# EAGLE board integratedBertha (EAGLE 6.6.0)
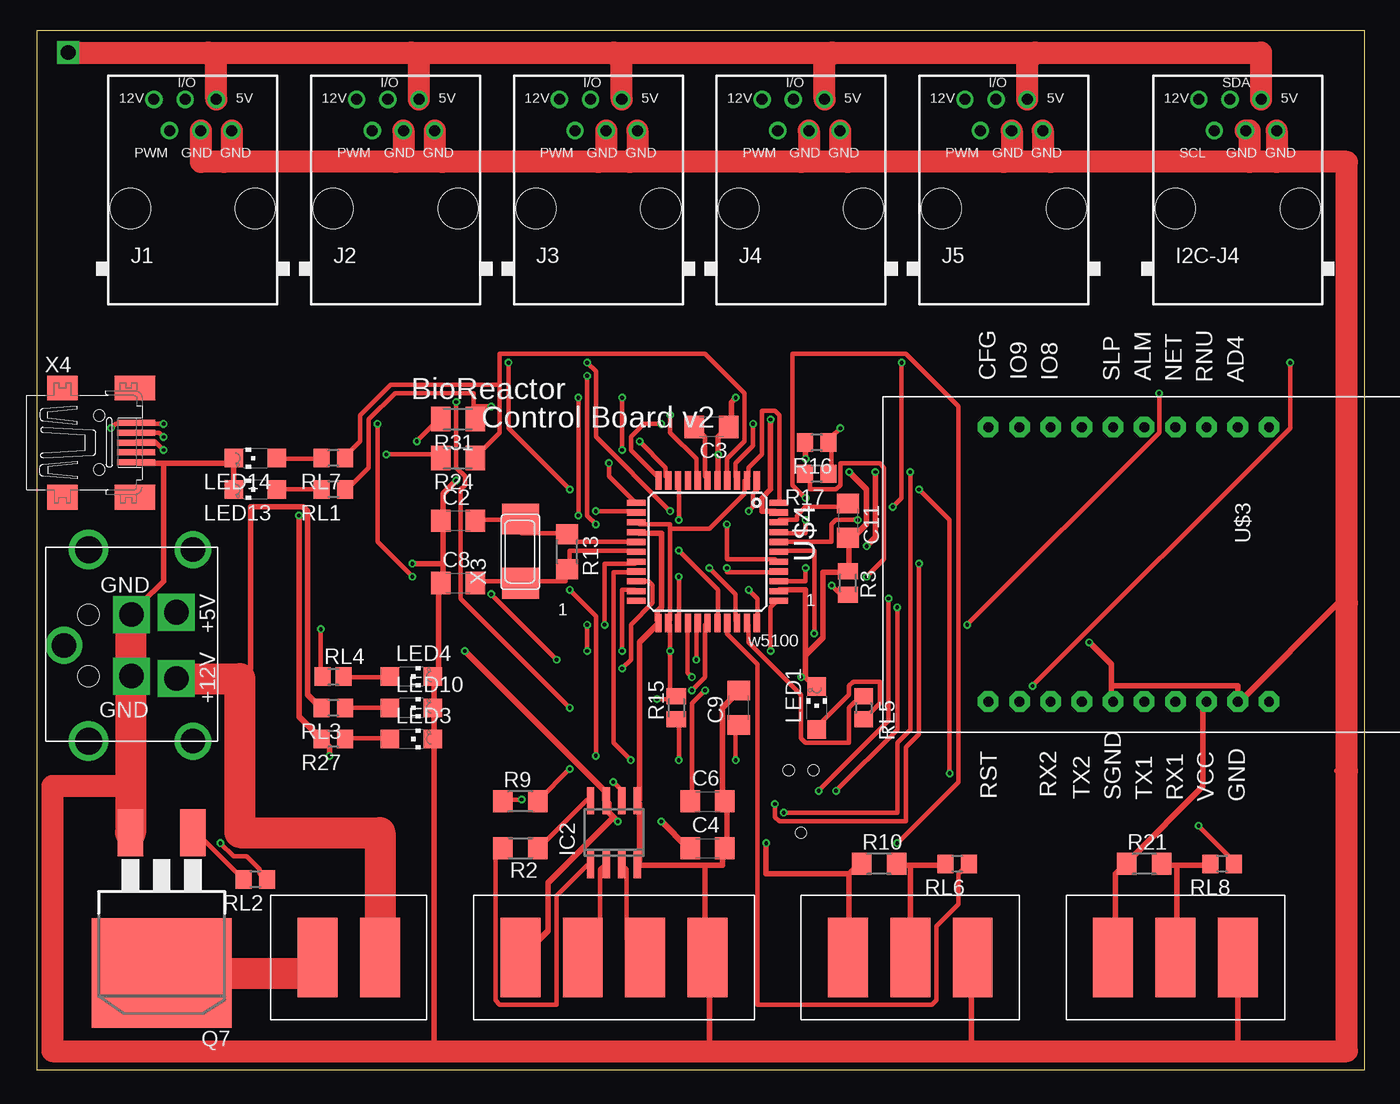
[diagram p0: board, top side]
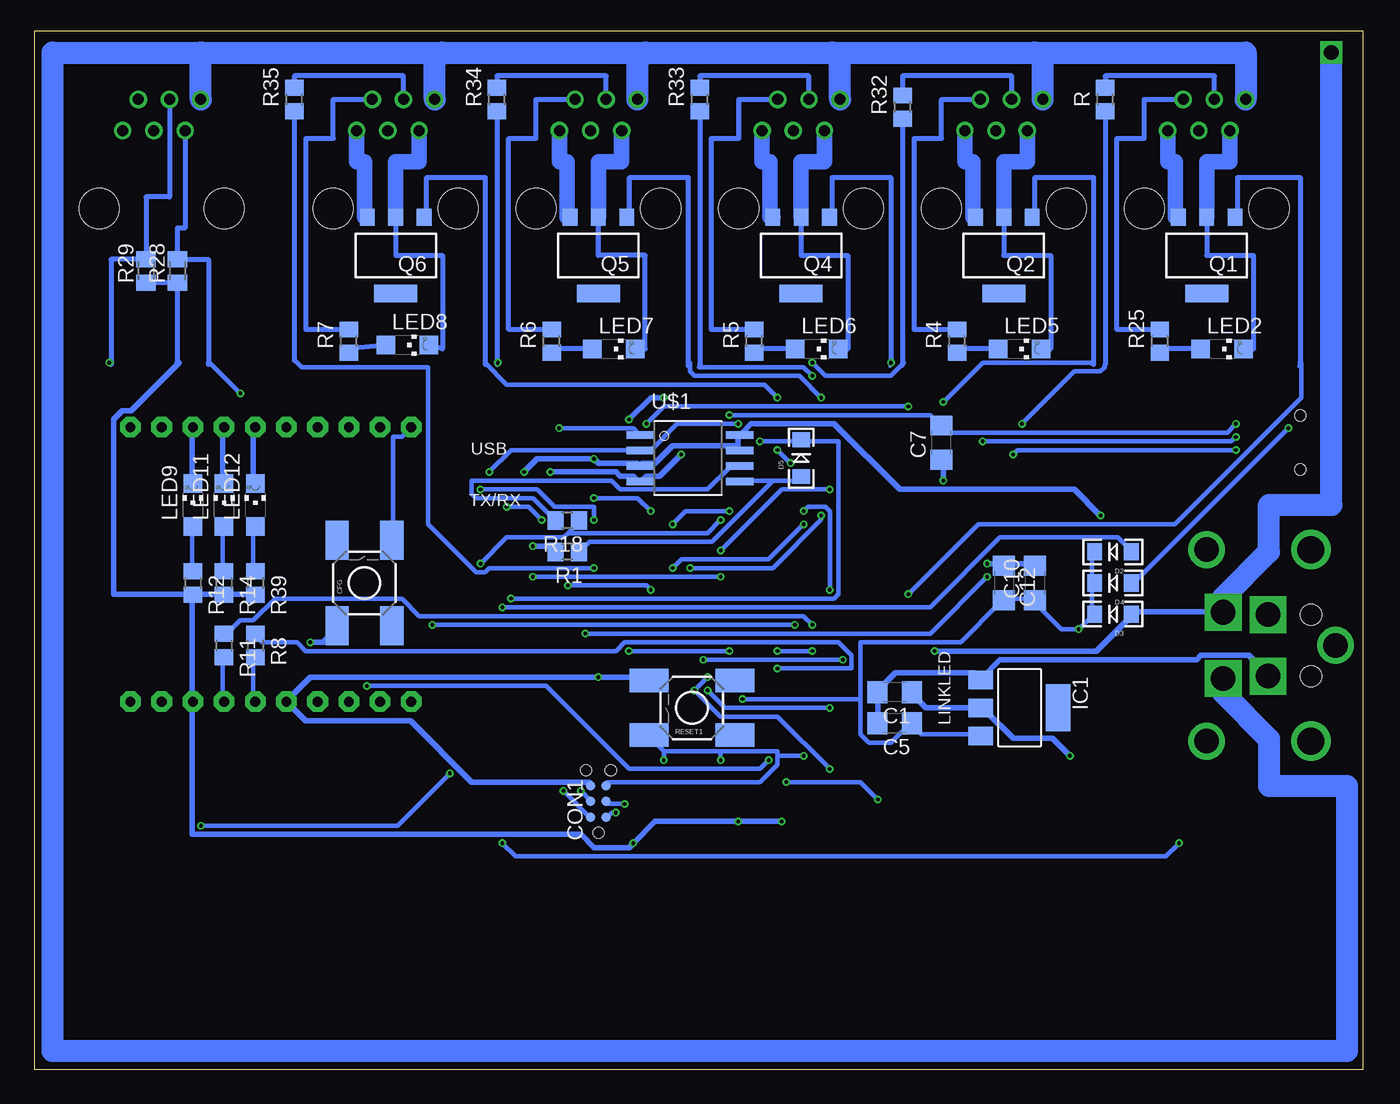
[diagram p1: board, bottom side, seen from below]

Size 108.13 x 84.57 mm. Coordinates in mm from the lower left corner, seen from the top.
Outline: 0,0 108.13,0 108.13,84.57 0,84.57 0,0
Copper layers (1*16): Top 0.035mm / dielectric 1.5mm / Bottom 0.035mm
Design rules "Fusion_eagle_rule_v1.1": minimum track width 6mil, minimum drill 12mil, track to track 6mil, track to pad 6mil, pad to pad 6mil, via to via 6mil, smd to smd 0mil, copper to edge 10mil, drill to drill 10mil, minimum pad ring 10mil, minimum via ring 6mil, stop-mask expansion 2mil, vias tented up to drill 100mil, thermal gap 10mil
Net classes: 0 default: width 0.356 mm; 1 power: width 0.457 mm; 2 VIN: width 0.457 mm; 3 fine: width 0.356 mm; 4 aref: width 0.356 mm
bKeepout: area -1.3,57.4 to 114.3,85.3; area -7.6,54.9 to 108,82.8
tRestrict: area -5.1,58.7 to 118.1,85.3
bRestrict: area -5.1,58.7 to 118.1,85.3
vRestrict: area 47,34.5 to 62.2,38.4; area 47,35.8 to 50.8,49.8; area 58.4,37.1 to 62.2,49.8; area 47,46 to 62.2,49.8; area 47,25.7 to 62.2,29.5; area 0,0.3 to 108,18

## Footprints (pad centres in the part's own frame; a part is rotated, then mirrored left to right if it is on the bottom)
C1206 = smd 1.6 x 1.8: 1 -1.4,0; 2 1.4,0
TACTILE_SWITCH_SMD = smd 3.175 x 1.905: 1 -3.493,2.223; 2 3.493,2.223; 3 -3.493,-2.223; 4 3.493,-2.223
TC2030-MCP-NL = smd 0.787 x 0.787: 5V 1.27,0.635; GND 3.81,0.635; MISO 1.27,-0.635; MOSI 2.54,0.635; RESET 3.81,-0.635; SCK 2.54,-0.635 | hole 0.889: 0,0; 5.08,-1.016; 5.08,1.016
LED-1206 = smd 1.2 x 1.4: A -1.5,0; C 1.5,0
RJ12-STRAIGHT-I2C = drill 0.9 pad 1.4: +5V 1.905,8.89; +12V -3.175,8.89; GND1 3.175,6.35; GND2 0.635,6.35; SCL -1.905,6.35; SDA -0.635,8.89 | hole 3.251: -5.08,0; 5.08,0
SOT223 = smd 1.499 x 2.007: 1 -2.261,-3.15; 2 0.025,-3.15; 3 2.311,-3.15 | smd 3.81 x 2.007: 4 0,3.15
SO8 = smd 0.6 x 2.2: 1 -1.905,-2.6; 2 -0.635,-2.6; 3 0.635,-2.6; 4 1.905,-2.6; 5 1.905,2.6; 6 0.635,2.6; 7 -0.635,2.6; 8 -1.905,2.6
RJ12-STRAIGHT = drill 0.9 pad 1.4: +5V 1.905,8.89; +12V -3.175,8.89; GND1 3.175,6.35; GND2 0.635,6.35; I/O -0.635,8.89; PWM -1.905,6.35 | hole 3.251: -5.08,0; 5.08,0
2-PIN-5.08S = smd 3.251 x 6.452: 1 -2.54,0; 2 2.54,0
CHIPLED_1206 = smd 1.5 x 1.5: A 0,-1.75; C 0,1.75
PG-SOT-223 = smd 1.2 x 1.4: 1 -2.311,-3.099; 2 0,-3.099; 3 2.311,-3.099 | smd 3.5 x 1.4: 4 0,3.099
D2PACK = smd 2.083 x 3.81: 1 -2.54,-8.89; 3 2.54,-8.89 | smd 11.43 x 8.89: 2 0,2.54
R0805 = smd 1.3 x 1.5: 1 -0.95,0; 2 0.95,0
R1206 = smd 1.6 x 1.803: 1 -1.422,0; 2 1.422,0
M0805 = smd 1.3 x 1.6: 1 -0.95,0; 2 0.95,0
M1206 = smd 1.6 x 2: 1 -1.4,0; 2 1.4,0
R0805' = smd 1.3 x 1.5: 1 -0.85,0; 2 0.85,0
SOIC_8-LEAD = smd 0.61 x 2.21: CE -1.905,-2.934; RST/HOLD -0.635,5.156; SCK 0.635,5.156; SI 1.905,5.156; SO -0.635,-2.934; VDD -1.905,5.156; VSS 1.905,-2.934; WP 0.635,-2.934
SZ05-ZIGBEE = drill 0.8 pad 1.676 octagon: 6 -11.415,13.971; 7 -11.415,11.431; 11 -11.415,1.271; 12 -11.415,-1.269; 13 -11.415,-3.809; 14 -11.415,-6.349; 17 10.925,-6.349; 18 10.925,-3.809; 19 10.925,-1.269; 25 10.925,13.971; ALM -11.415,3.811; CFG -11.415,-8.889; GND 10.925,11.431; NET -11.415,6.351; RNU -11.415,8.891; RST 10.925,-8.889; RX1 10.925,6.351; SGND 10.925,1.271; TX1 10.925,3.811; VCC 10.925,8.891
TQFP44 = smd 1.5 x 0.5: 1 -5.8,4; 2 -5.8,3.2; 3 -5.8,2.4; 4 -5.8,1.6; 5 -5.8,0.8; 6 -5.8,0; 7 -5.8,-0.8; 8 -5.8,-1.6; 9 -5.8,-2.4; 10 -5.8,-3.2; 11 -5.8,-4; 23 5.8,-4; 24 5.8,-3.2; 25 5.8,-2.4; 26 5.8,-1.6; 27 5.8,-0.8; 28 5.8,0; 29 5.8,0.8; 30 5.8,1.6; 31 5.8,2.4; 32 5.8,3.2; 33 5.8,4 | smd 0.5 x 1.5: 12 -4,-5.8; 13 -3.2,-5.8; 14 -2.4,-5.8; 15 -1.6,-5.8; 16 -0.8,-5.8; 17 0,-5.8; 18 0.8,-5.8; 19 1.6,-5.8; 20 2.4,-5.8; 21 3.2,-5.8; 22 4,-5.8; 34 4,5.8; 35 3.2,5.8; 36 2.4,5.8; 37 1.6,5.8; 38 0.8,5.8; 39 0,5.8; 40 -0.8,5.8; 41 -1.6,5.8; 42 -2.4,5.8; 43 -3.2,5.8; 44 -4,5.8
KPJX-4S-S = drill 2 square: +5V 2.7,1.35; +12V -2.7,1.35; GND1 -2.5,5; GND2 2.5,5 | drill 2: P$1 -7.8,0; P$2 7.8,0; P$11 0,10.5 | drill 2.2: P$3 -7.8,8.5; P$4 7.8,8.5 | hole 1.7: -2.5,8.5; 2.5,8.5
4-PIN-5.08S = smd 3.251 x 6.452: 1 -7.62,0; 2 -2.54,0; 3 2.54,0; 4 7.62,0
3-PIN-5.08S = smd 3.251 x 6.452: 1 -5.08,0; 2 0,0; 3 5.08,0
NX6035 = smd 2.5 x 3: P$1 2.665,0; P$2 -2.565,0
32005-201 = smd 3.1 x 0.5: 1 3,1.6; 2 3,0.8; 3 3,0; 4 3,-0.8; 5 3,-1.6 | smd 2.5 x 2: M1 -3,-4.45; M2 -3,4.45 | smd 3.3 x 2: M3 2.9,4.45; M4 2.9,-4.45 | hole 0.9: 0,2.2; 0,-2.2

## Placement (x,y rotation side)
C1  10uF  [C1206]  38.1,30.73 180 bottom
C2  22pF  [C1206]  34.29,44.7 0 top
C3  100nF  [C1206]  54.93,52.32 180 top
C4  100nF  [C1206]  54.61,18.03 0 top
C5  10uF  [C1206]  38.1,28.19 180 bottom
C6  330nF  [C1206]  54.61,21.84 0 top
C7  10uF  [C1206]  34.29,51.05 90 bottom
C8  22pF  [C1206]  34.29,39.62 0 top
C9  100nF  [C1206]  57.15,29.46 90 top
C10  10uF  [C1206]  26.67,39.62 90 bottom
C11  100nF  [C1206]  66.04,44.7 270 top
C12  100nF  [C1206]  29.21,39.62 270 bottom
CFG  Configure  [TACTILE_SWITCH_SMD]  81.28,39.62 90 bottom
CON1  SPI  [TC2030-MCP-NL]  62.23,19.3 90 bottom
D2  1N581D1206  [LED-1206]  20.32,42.16 180 bottom
D3  1N581D1206  [LED-1206]  20.32,37.08 180 bottom
D4  1N581D1206  [LED-1206]  20.32,39.62 180 bottom
D5  1N581D1206  [LED-1206]  45.72,49.78 90 bottom
I2C-J4  RJ12STRAIGHT-I2C  [RJ12-STRAIGHT-I2C]  97.79,70.1 0 top
IC1  REG1117  [SOT223]  27.94,29.46 270 bottom
IC2  AD8223  [SO8]  46.99,19.3 0 top
J1  RJ12  [RJ12-STRAIGHT]  12.7,70.1 0 top
J2  RJ12  [RJ12-STRAIGHT]  29.21,70.1 0 top
J3  RJ12  [RJ12-STRAIGHT]  45.72,70.1 0 top
J4  RJ12  [RJ12-STRAIGHT]  62.23,70.1 0 top
J5  RJ12  [RJ12-STRAIGHT]  78.74,70.1 0 top
J7  22--02  [2-PIN-5.08S]  25.4,9.14 180 top
LED1  GREEN  [CHIPLED_1206]  63.5,29.46 0 top
LED2  Blue  [CHIPLED_1206]  11.43,58.67 270 bottom
LED3  RED  [CHIPLED_1206]  30.48,26.92 270 top
LED4  RED  [CHIPLED_1206]  30.48,32 270 top
LED5  Blue  [CHIPLED_1206]  27.94,58.67 270 bottom
LED6  Blue  [CHIPLED_1206]  44.45,58.67 270 bottom
LED7  BLue  [CHIPLED_1206]  60.96,58.67 270 bottom
LED8  Blue  [CHIPLED_1206]  77.79,58.99 270 bottom
LED9  RED  [CHIPLED_1206]  95.25,45.97 0 bottom
LED10  RED  [CHIPLED_1206]  30.48,29.46 270 top
LED11  RED  [CHIPLED_1206]  92.71,45.97 0 bottom
LED12  RED  [CHIPLED_1206]  90.17,45.97 0 bottom
LED13  RED  [CHIPLED_1206]  17.78,47.24 90 top
LED14  GREEN  [CHIPLED_1206]  17.78,49.78 90 top
Q1  BSP75  [PG-SOT-223]  12.7,66.29 180 bottom
Q2  BSP75  [PG-SOT-223]  29.21,66.29 180 bottom
Q4  BSP75  [PG-SOT-223]  45.72,66.29 180 bottom
Q5  BSP75  [PG-SOT-223]  62.23,66.29 180 bottom
Q6  BSP75  [PG-SOT-223]  78.74,66.29 180 bottom
Q7  IRF3704S  [D2PACK]  10.16,10.41 180 top
R  1k  [R0805]  20.95,78.99 90 bottom
R1  10k  [R0805]  64.77,42.16 180 bottom
R2  300  [R1206]  39.37,18.03 180 top
R3  10k  [M0805]  66.04,39.62 270 top
R4  1k  [R0805]  33.02,59.31 90 bottom
R5  1k  [R0805]  49.53,59.31 90 bottom
R6  1k  [R0805]  66.04,59.31 90 bottom
R7  1k  [R0805]  82.55,59.31 90 bottom
R8  1K  [R0805]  90.17,34.54 270 bottom
R9  100  [R1206]  39.37,21.84 0 top
R10  4.7k  [R1206]  68.58,16.76 0 top
R11  1K  [R0805]  92.71,34.54 270 bottom
R12  1K  [R0805]  95.25,39.62 270 bottom
R13  1M  [R1206]  43.18,42.16 270 top
R14  1K  [R0805]  92.71,39.62 270 bottom
R15  10k  [M0805]  52.07,29.46 90 top
R16  10k  [R0805]  63.5,51.05 180 top
R17  1k  [R0805]  63.5,48.51 180 top
R18  10k  [R0805]  64.77,44.7 180 bottom
R21  4.7k  [R1206]  90.17,16.76 0 top
R24  22  [M1206]  34.29,49.78 180 top
R25  1k  [R0805]  16.51,59.31 90 bottom
R27  1K  [R0805]  24.13,26.92 180 top
R28  10K  [M0805]  96.52,65.02 90 bottom
R29  10K  [M0805]  99.06,65.02 90 bottom
R31  22  [M1206]  34.29,52.96 180 top
R32  1k  [R0805]  37.47,78.36 90 bottom
R33  1k  [R0805]  53.98,78.99 90 bottom
R34  1k  [R0805]  70.48,78.99 90 bottom
R35  1k  [R0805]  87,78.99 90 bottom
R39  1K  [R0805]  90.17,39.62 270 bottom
RESET1  Reset uC  [TACTILE_SWITCH_SMD]  54.61,29.46 180 bottom
RL1  1K  [R0805]  24.13,47.24 180 top
RL2  1K  [R0805]  17.78,15.49 180 top
RL3  1K  [R0805]  24.13,29.46 180 top
RL4  1K  [R0805']  24.13,32 0 top
RL5  1K  [R0805]  67.31,29.46 270 top
RL6  1K  [R0805]  74.93,16.76 180 top
RL7  1K  [R0805]  24.13,49.78 180 top
RL8  1K  [R0805]  96.52,16.76 180 top
U$1  SST25VF064C  [SOIC_8-LEAD]  55.88,49.78 270 bottom
U$3  SZ05-ZIGBEE  [SZ05-ZIGBEE]  86.36,40.89 270 top
U$4  ATMEGA32U4-AU  [TQFP44]  54.61,42.16 270 top
U$6  KPJX-4S-S  [KPJX-4S-S]  12.7,34.54 90 top
X1  22-23-20415.08S  [4-PIN-5.08S]  46.99,9.14 0 top
X2  22-23-20315.08S  [3-PIN-5.08S]  71.12,9.14 0 top
X3  16MHz  [NX6035]  39.37,42.16 90 top
X4  MINI-USB  [32005-201]  5.08,51.05 0 top
X5  22-23-20315.08S  [3-PIN-5.08S]  92.71,9.14 0 top

## Library data of the parts
C1-C12 R R1 R4-R8 R11-R14 R16-R18 R25 R27 R32-R35 R39 RL1-RL3 RL5-RL8 = rcl
CFG CON1 D2-D5 I2C-J4 J1-J5 J7 RESET1 U$3 U$6 X1-X3 X5 = lpatiny
IC1 = burr-brown; MPN: REG1117; OC_FARNELL: 1097566; OC_NEWARK: 14P6981
IC2 = analog-devices; MPN: AD620AR; OC_FARNELL: 1464424; OC_NEWARK: 05F7109
LED1-LED14 U$4 = adafruit
Q1 Q2 Q4-Q6 = infineon; OC_FARNELL: unknown; OC_NEWARK: unknown
Q7 = transistor-power
R2 R3 R9 R10 R15 R21 R24 R28 R29 R31 RL4 = resistor
U$1 = BertaLib
X4 = con-cypressindustries; OC_FARNELL: unknown; OC_NEWARK: unknown

## Nets
3.3V [power]: C1.1 IC1.2 R1.2 R16.2 R27.2 U$1.RST/HOLD U$1.VDD U$1.WP
+5V [power]: C4.1 D3.A I2C-J4.+5V IC2.7 J1.+5V J2.+5V J3.+5V J4.+5V J5.+5V R4.2 R5.2 R6.2 R7.2 R10.1 R12.2 R14.2 R21.1 R25.2 R28.1 R29.1 R39.2 U$3.VCC U$6.+5V X1.1 X2.1 X5.1
+5V/1 [fine]: C5.1 C10.1 C12.2 D2.C D3.C D4.C IC1.3 R15.2 RL4.1 U$4.2 U$4.14 U$4.24 U$4.34 U$4.44
+12V [power]: I2C-J4.+12V J1.+12V J2.+12V J3.+12V J4.+12V J5.+12V J7.1 RL3.2 U$6.+12V
A0: R35.1 U$4.36
A1: R33.1 U$4.37
A2: R32.1 U$4.38
A3: R.1 U$4.39
A4: R34.1 U$4.40
A5: RL8.1 U$4.41
AREF: C11.1 U$4.42
CS: R17.2 U$4.25
D5*: Q5.1 U$4.31
D6*: Q1.1 U$4.27
D7*: RL2.1 U$4.1
D8*: Q2.1 U$4.28
D9*: Q4.1 U$4.29
D10*: RL6.1 U$4.30
D11*: Q6.1 U$4.12
D12*: C6.1 R9.2 U$4.26
D13*: RL5.1 U$4.32
D+USB: R24.2 X4.3
D-USB: R31.2 X4.2
DIFF+: IC2.3 X1.3
DIFF-: IC2.2 X1.2
FMOSI: D5.A R1.1 U$1.SI
GND [power]: C1.2 C2.1 C3.1 C4.2 C5.2 C6.2 C7.1 C8.1 C9.2 C10.2 C11.2 C12.1 CFG.1 CON1.GND I2C-J4.GND1 I2C-J4.GND2 IC1.1 IC2.4 IC2.5 J1.GND1 J1.GND2 J2.GND1 J2.GND2 J3.GND1 J3.GND2 J4.GND1 J4.GND2 J5.GND1 J5.GND2 LED1.C LED3.C LED4.C LED10.C LED13.C LED14.C Q1.3 Q2.3 Q4.3 Q5.3 Q6.3 Q7.3 R3.1 RESET1.4 U$1.VSS U$3.GND U$3.SGND U$4.5 U$4.15 U$4.23 U$4.35 U$4.43 U$6.GND1 U$6.GND2 X1.4 X2.3 X4.5 X5.3
GND1 [VIN]: LED9.C U$3.RNU
GND2 [VIN]: LED11.C U$3.NET
GND3 [VIN]: LED12.C U$3.ALM
HWB: R3.2 U$4.33
ISP+5V: CON1.5V D2.A
MISO: CON1.MISO U$1.SO U$4.11
MOSI: CON1.MOSI D5.C U$4.10
N$1: J3.PWM LED6.C Q4.2
N$2: J2.I/O R32.2
N$3: LED1.A RL5.2
N$4: LED5.A R4.1
N$5: J4.PWM LED7.C Q5.2
N$6: Q7.1 RL2.2
N$7: J3.I/O R33.2
N$8: LED13.A RL1.2
N$9 [power]: R21.2 RL8.2 X5.2
N$10: R16.1 R17.1 U$1.CE
N$11: R11.2 U$3.RX1
N$12: LED4.A RL4.2
N$13: IC2.1 R2.2
N$14: LED14.A RL7.2
N$15: IC2.8 R2.1
N$16: C3.2 U$4.6
N$17: LED2.A R25.1
N$18: J1.I/O R.2
N$19: J5.PWM LED8.C Q6.2
N$20: LED3.A R27.1
N$21 [power]: R10.2 RL6.2 X2.2
N$22: LED6.A R5.1
N$23: R18.2 U$1.SCK
N$24: R8.2 U$3.TX1
N$25: LED9.A R12.1
N$26: LED11.A R14.1
N$27: LED12.A R39.1
N$28: J2.PWM LED5.C Q2.2
N$29: J4.I/O R34.2
N$30: LED7.A R6.1
N$32: J5.I/O R35.2
N$33: LED8.A R7.1
N$34: J1.PWM LED2.C Q1.2
N$35: CFG.4 U$3.CFG
N$36: J7.2 Q7.2
N$40: IC2.6 R9.1
N$42: C8.2 R13.2 U$4.17 X3.P$2
N$75: LED10.A RL3.1
RD+: R24.1 RL7.1 U$4.4
RD-: R31.1 RL1.1 U$4.3
RESET: C9.1 CON1.RESET R15.1 RESET1.2 U$4.13
RX: R8.1 U$4.20
RXLED: U$4.8
SCK: CON1.SCK R18.1 U$4.9
SCL: I2C-J4.SCL R28.2 U$4.18
SDA: I2C-J4.SDA R29.2 U$4.19
TX: R11.1 U$4.21
TXLED: U$4.22
VUSB: C7.2 D4.A U$4.7 X4.1
XTAL1: C2.2 R13.1 U$4.16 X3.P$1

## Tracks (layer width: path | path; a pad name or v marks a point on that pad's centre or on a via)
3.3V  (via drill 0.3)
  Top 0.457: v23.82,25.55 23.82,26.26 23.47,26.62 R27.2 23.11,26.98 21.34,28.75 v21.34,45.11 | v62.59,49.73 62.59,50.8 R16.2 | v67.56,42.62 68.28,43.33 v68.28,48.67
  Bottom 0.457: v23.82,25.55 25.25,26.98 28.45,26.98 30.58,29.11 30.94,29.11 IC1.2 31.29,29.46 35.56,29.46 36.63,30.53 C1.1 | 50.85,50.8 50.85,51.51 U$1.VDD 50.49,51.87 49.78,52.58 43.03,52.58 37.69,47.24 23.47,47.24 v21.34,45.11 | 50.85,50.8 50.85,50.44 U$1.RST/HOLD | v67.56,42.62 66.14,42.62 65.79,42.27 R1.2 | v68.28,48.67 67.21,49.73 v62.59,49.73 62.23,49.38 59.03,49.38 U$1.WP 58.67,49.38 57.61,49.38 56.19,50.8 50.85,50.8
+5V  (via drill 0.3, 1.2)
  Top 0.457: X5.1 87.83,9.2 87.83,15.95 88.54,16.66 R21.1 88.9,17.02 94.94,23.06 94.94,29.82 U$3.VCC | 66.14,15.95 66.85,16.66 R10.1 | 66.14,15.95 66.14,9.2 X2.1 | v50.85,20.22 52.98,18.09 C4.1 | 46.94,20.57 46.58,20.93 46.58,21.64 IC2.7 46.23,22 46.23,22.71 v34.85,34.09 | 46.94,20.57 v47.3,20.22 | 46.94,20.57 41.6,15.24 41.6,11.33 39.47,9.2 X1.1 | 66.14,15.95 59.38,15.95 v59.38,18.44
  Top 1.778: v2.54,82.8 13.97,82.8 | 13.97,82.8 30.48,82.8 | 30.48,82.8 46.99,82.8 | 46.99,82.8 64.77,82.8 | 64.77,82.8 81.28,82.8 | 81.28,82.8 99.69,82.8 I2C-J4.+5V | J1.+5V 14.61,82.17 13.97,82.8 | J2.+5V 31.11,82.17 30.48,82.8 | J3.+5V 47.62,82.17 46.99,82.8 | J4.+5V 64.14,82.17 64.77,82.8 | J5.+5V 80.64,82.17 81.28,82.8
  Bottom 0.406: R25.2 20,60.26 20,75.82 17.78,75.82 17.78,78.99 J1.+5V | R4.2 36.51,60.26 36.51,75.82 34.29,75.82 34.29,78.99 J2.+5V | R5.2 53.02,60.26 53.02,75.82 50.8,75.82 50.8,78.99 J3.+5V | R6.2 69.53,60.26 69.53,75.82 67.31,75.82 67.31,78.99 J4.+5V | R7.2 86.04,60.26 86.04,75.82 83.82,75.82 83.82,78.99 J5.+5V | R29.1 R28.1 96.52,57.56 96.52,57.4
  Bottom 0.457: R39.2 90.32,38.71 92.46,38.71 R14.2 92.81,38.71 94.94,38.71 R12.2 | R12.2 95.3,38.35 95.3,30.18 U$3.VCC 95.3,29.82 95.3,19.15 63.65,19.15 62.59,18.09 59.74,18.09 v59.38,18.44 57.61,20.22 v50.85,20.22 v47.3,20.22 | 96.52,57.56 96.37,57.56 100.28,53.64 100.99,53.64 101.7,52.93 101.7,38.71 95.3,38.71 R12.2 | U$6.+5V 12.09,37.29 18.49,37.29 D3.A 18.85,36.93 21.69,34.09 v34.85,34.09
  Bottom 1.778: U$6.+5V 11.35,38.43 7.62,42.16 7.62,45.97 2.54,45.97 v2.54,82.8
+5V/1  (via drill 0.3)
  Top 0.356: v23.11,35.86 23.11,32.31 RL4.1 | 51.56,44.04 51.56,36.58 U$4.24 51.56,36.22 v51.56,34.09 51.56,30.89 51.92,30.53 R15.2 51.92,30.18 v50.49,30.18 | 51.56,44.04 51.56,44.4 49.07,44.4 U$4.14 | v59.74,34.09 59.74,37.64 60.1,38 U$4.34 | 51.56,44.04 54.76,44.04 57.61,46.89 57.61,47.95 U$4.2 57.96,48.31 57.96,49.02 59.03,50.09 59.03,53.64 60.1,53.64 60.45,53.29 60.45,46.18 U$4.44
  Bottom 0.356: IC1.3 31.29,27.33 35.92,27.33 36.63,28.04 C5.1 36.98,28.04 38.41,26.62 40.18,26.62 40.89,27.33 40.89,30.18 | D2.C 22.05,41.91 22.05,39.78 D4.C 22.05,39.42 22.05,37.29 D3.C 22.05,36.93 v23.11,35.86 24.54,35.86 26.67,38 C10.1 26.67,38.35 29.16,38.35 C12.2 29.52,38 32.72,34.8 40.89,34.8 40.89,30.18 | v51.56,34.09 v59.74,34.09 | v50.49,30.18 40.89,30.18
+12V
  Top 0.457: RL3.2 23.11,29.46 22.05,30.53 22.05,45.47 21.69,45.82 17.42,45.82 17.42,32.66 16.51,31.84
  Top 2.54: U$6.+12V 16.51,31.84 16.51,19.3 27.94,19.3 J7.1
  Bottom 1.778: 94.61,82.8 106.68,82.8 106.68,1.52 1.27,1.52 1.27,23.11 7.62,23.11 7.62,26.92 11.35,30.65 U$6.+12V | 94.61,82.8 74.93,82.8 | 74.93,82.8 58.42,82.8 | 58.42,82.8 43.18,82.8 | 43.18,82.8 26.67,82.8 | 26.67,82.8 9.53,82.8 J1.+12V | J3.+12V 42.55,82.17 43.18,82.8 | J4.+12V 59.05,82.17 58.42,82.8 | J5.+12V 75.56,82.17 74.93,82.8 | J2.+12V 26.04,82.17 26.67,82.8 | I2C-J4.+12V 94.61,82.8
A0  (via drill 0.3)
  Top 0.356: v62.59,40.84 62.59,39.78 60.45,39.78 U$4.36
  Bottom 0.305: 86.87,57.66 87,57.72
  Bottom 0.356: v62.59,40.84 71.12,40.84 71.48,40.49 72.19,40.49 76.1,44.4 76.1,57.2 86.41,57.2 86.87,57.66
  Bottom 0.406: R35.1 87,57.72
A1  (via drill 0.3)
  Top 0.356: v56.19,40.84 56.19,40.49 60.1,40.49 U$4.37 | v45.52,44.4 44.81,45.11 v44.81,56.49
  Bottom 0.305: 53.95,57.25 53.98,57.4
  Bottom 0.356: v56.19,40.84 55.47,41.55 48.36,41.55 v45.52,44.4 | v44.81,56.49 45.52,57.2 54.05,57.2 53.95,57.25
  Bottom 0.406: R33.1 53.98,57.4
A2  (via drill 0.3)
  Top 0.356: v56.19,44.4 56.19,41.55 60.1,41.55 U$4.38 | v51.56,45.47 45.52,51.51 45.52,56.84 v44.81,57.56
  Bottom 0.305: 37.49,57.25 37.47,57.4
  Bottom 0.356: v56.19,44.4 55.12,45.47 v51.56,45.47 | v44.81,57.56 43.74,56.49 38.41,56.49 37.34,57.56 37.47,57.56
  Bottom 0.406: R32.1 37.47,57.56 37.47,57.4
A3  (via drill 0.3)
  Top 0.356: v63.3,35.51 63.3,42.27 60.45,42.27 U$4.39 | v30.58,40.13 27.74,42.98 v27.74,52.58
  Bottom 0.305: 21.03,57.25 20.95,57.4
  Bottom 0.356: v63.3,35.51 35.2,35.51 v30.58,40.13 | v27.74,52.58 23.47,56.84 21.34,56.84 20.98,57.2 21.03,57.25
  Bottom 0.406: R.1 20.95,57.4
A4  (via drill 0.3)
  Top 0.356: v66.85,44.75 65.08,44.75 64.72,44.4 64.72,42.98 60.45,42.98 U$4.40 | v69.7,45.82 70.41,46.53 v70.41,57.56
  Bottom 0.305: 70.41,57.45 70.48,57.45
  Bottom 0.356: v66.85,44.75 67.92,45.82 v69.7,45.82 | v70.41,57.56 70.41,57.45
  Bottom 0.406: R34.1 70.48,57.45 70.48,57.4
A5  (via drill 0.3)
  Top 0.356: v62.59,44.75 62.59,43.69 60.45,43.69 U$4.41 | v71.83,47.24 74.32,44.75 v74.32,24.13 | v94.59,19.86 97.43,17.02 RL8.1
  Bottom 0.356: v62.59,44.75 62.59,45.82 65.79,45.82 67.21,47.24 v71.83,47.24 | v74.32,24.13 78.59,19.86 v94.59,19.86
AREF
  Top 0.356: U$4.42 60.45,44.75 61.87,44.75 61.87,45.11 62.59,45.82 65.79,45.82 C11.1
CS  (via drill 0.3)
  Top 0.356: v52.27,40.13 52.27,36.58 U$4.25 | v67.56,40.13 68.99,41.55 68.99,49.02 68.63,49.38 65.43,49.38 65.43,47.6 65.08,47.24 62.94,47.24 62.94,47.95 62.59,48.31 R17.2
  Bottom 0.356: v67.56,40.13 v52.27,40.13
D5*  (via drill 0.3)
  Top 0.356: v54.76,40.84 56.9,38.71 56.9,36.58 U$4.31 | v44.09,54.71 v44.09,45.11
  Bottom 0.305: 54.97,57.25 54.93,57.4
  Bottom 0.356: v54.76,40.84 48.01,40.84 44.09,44.75 v44.09,45.11 | v44.09,54.71 45.87,56.49 54.41,56.49 54.76,56.84 54.76,57.56 54.93,57.56
  Bottom 0.406: Q5.1 59.69,69.39 59.69,72.64 54.93,72.64 54.93,57.56 54.93,57.4
D6*  (via drill 0.3)
  Top 0.356: v53.7,33.38 53.7,36.22 U$4.27 | v36.98,38.71 v42.32,33.38
  Bottom 0.305: 5.18,57.25 5.08,57.4
  Bottom 0.356: v42.32,33.38 v53.7,33.38 | v36.98,38.71 31.29,44.4 15.29,44.4 4.98,54.71 4.98,57.56 5.08,57.56
  Bottom 0.406: Q1.1 10.16,69.39 10.16,72.64 5.08,72.64 5.08,57.56 5.08,57.4
D7*  (via drill 0.3)
  Top 0.356: v14.94,18.44 16,17.37 17.07,17.37 18.14,16.31 18.14,15.95 18.49,15.6 RL2.1 | v70.05,18.44 75.03,23.42 75.03,54 70.76,58.27 61.52,58.27 61.52,47.6 v62.59,46.53 | v57.96,45.47 58.32,45.82 58.32,46.89 58.67,47.24 58.67,47.95 U$4.1
  Bottom 0.356: v14.94,18.44 16,17.37 68.99,17.37 v70.05,18.44 | v62.59,46.53 59.03,46.53 v57.96,45.47
D8*  (via drill 0.3)
  Top 0.356: v53.34,30.89 54.41,31.95 54.41,36.22 U$4.28 | v43.38,29.46 34.49,38.35 34.49,47.24 34.85,47.6 34.85,48.31 34.14,49.02 v34.14,54.36
  Bottom 0.305: 22.05,57.45 21.91,57.45
  Bottom 0.356: v53.34,30.89 51.92,29.46 v43.38,29.46 | v34.14,54.36 30.94,57.56 22.05,57.56 22.05,57.45
  Bottom 0.406: Q2.1 26.67,69.39 26.67,72.64 21.91,72.64 21.91,57.45 21.91,57.4
D9*  (via drill 0.3)
  Top 0.356: v52.27,42.27 55.47,39.06 55.47,36.58 U$4.29 | v43.38,47.24 38.41,52.22 v38.41,57.56
  Bottom 0.305: 38.51,57.25 38.42,57.4
  Bottom 0.356: v52.27,42.27 47.3,47.24 v43.38,47.24 | v38.41,57.56 38.42,57.4
  Bottom 0.406: Q4.1 43.18,69.39 43.18,72.64 38.42,72.64 38.42,57.4
D10*
  Top 0.356: RL6.1 75.74,16.66 75.03,15.95 75.03,13.46 73.25,11.68 73.25,5.64 72.9,5.28 58.67,5.28 58.67,33.02 56.19,35.51 56.19,36.22 U$4.30
D11*  (via drill 0.3)
  Top 0.356: v46.58,49.38 46.58,48.31 48.72,46.18 U$4.12 | v47.65,54.71 v47.65,50.44
  Bottom 0.305: 71.42,58.06 71.44,58.06
  Bottom 0.356: v47.65,50.44 v46.58,49.38 | v47.65,54.71 48.72,55.78 69.7,55.78 71.48,57.56 71.44,57.56
  Bottom 0.406: Q6.1 76.2,69.39 76.2,72.64 71.44,72.64 71.44,58.06 71.44,57.56 71.44,57.4
D12*  (via drill 0.3)
  Top 0.356: v53.34,31.95 52.98,32.31 52.98,36.22 U$4.26 | v54.41,30.89 53.34,29.82 53.34,22 C6.1 | v43.38,24.49 40.89,22 R9.2
  Bottom 0.356: v53.34,31.95 v54.41,30.89 52.27,28.75 47.65,28.75 v43.38,24.49
D13*
  Top 0.356: U$4.32 57.96,36.22 57.96,34.8 62.23,30.53 62.23,26.98 62.59,26.62 66.14,26.62 66.14,29.46 67.21,30.53 RL5.1
D+USB  (via drill 0.3)
  Top 0.356: v28.45,50.09 32.72,50.09 R24.2 | v10.31,50.44 9.6,51.16 8.18,51.16 X4.3
  Bottom 0.356: v28.45,50.09 28.09,50.44 v10.31,50.44
D-USB  (via drill 0.3)
  Top 0.356: v30.94,51.16 32.72,52.93 R31.2 | v10.31,51.51 9.96,51.87 8.18,51.87 X4.2
  Bottom 0.356: v30.94,51.16 10.67,51.16 v10.31,51.51
DIFF+
  Top 0.356: IC2.3 47.65,16.66 48.01,16.31 48.01,10.62 49.43,9.2 X1.3
DIFF-
  Top 0.356: IC2.2 46.23,16.66 45.87,16.31 45.87,10.62 44.45,9.2 X1.2
FMOSI
  Bottom 0.356: 48.01,47.95 50.49,47.95 U$1.SI | 48.01,47.95 45.87,47.95 D5.A | 48.01,47.95 52.98,42.98 62.94,42.98 63.65,42.27 R1.1
GND  (via drill 0.3)
  Top 0.457: 105.87,24.33 106.68,24.33 | v59.74,52.93 59.74,47.24 59.03,46.53 59.03,45.47 60.1,45.47 U$4.43 | v56.9,54.71 56.54,54.36 56.54,52.58 C3.1 56.19,52.22 55.47,51.51 v55.47,50.09 55.47,48.31 U$4.5 | 66.14,42.98 66.14,40.84 R3.1 65.79,40.49 64.01,40.49 64.01,35.15 62.59,33.73 | 62.59,31.95 62.59,33.73 | 62.59,33.73 62.59,39.06 60.45,39.06 U$4.35 | 62.59,31.95 63.3,31.24 LED1.C | v66.14,48.67 67.56,47.24 67.56,44.4 66.14,42.98 | 66.14,42.98 C11.2 | v85.7,34.8 87.48,33.02 87.48,31.24 | 87.48,31.24 87.48,30.18 U$3.SGND | v62.23,31.95 62.59,31.95 | U$4.15 49.07,43.69 50.85,43.69 50.85,37.64 50.49,37.29 50.49,36.58 U$4.23 50.49,36.22 49.07,34.8 49.07,22 IC2.5 49.07,21.64 49.07,17.02 IC2.4 49.07,16.66 54.41,16.66 | C9.2 56.9,30.53 55.83,29.46 55.83,22 C6.2 56.19,21.64 56.19,18.09 C4.2 55.83,17.73 55.83,16.66 54.41,16.66 | 32.36,29.46 32.36,26.98 LED3.C 32.36,26.62 32.36,1.52 | 32.36,29.46 32.36,31.95 LED4.C 32.36,32.31 32.72,32.66 32.72,39.42 C8.1 33.07,39.78 33.07,41.2 | 32.36,29.46 LED10.C | 33.07,41.2 33.07,44.4 C2.1 33.07,44.75 33.07,46.89 v34.14,47.95 | 33.07,41.2 v30.58,41.2 | 16,49.38 16,49.73 LED14.C 16,49.38 | 16,49.38 16,47.24 LED13.C | 10.31,49.38 8.18,49.38 X4.5 | 10.31,49.38 16,49.38 | 106.68,38 105.97,38 98.15,30.18 U$3.GND 97.79,30.18 97.79,31.24 87.48,31.24 | 10.31,49.38 10.31,39.78 8.53,38 U$6.GND2 | 54.76,1.52 54.76,8.84 X1.4 54.41,9.2 54.41,16.66 | 76.1,1.52 76.1,8.84 X2.3 | 97.79,1.52 X5.3
  Top 1.778: 100.97,73.91 106.68,73.91 106.68,38 106.68,24.33 106.68,1.52 97.79,1.52 76.1,1.52 54.76,1.52 32.36,1.52 1.27,1.52 1.27,23.11 7.62,23.11 7.62,28.15 U$6.GND1 U$6.GND2 | 100.97,73.91 98.74,73.91 | 98.74,73.91 82.55,73.91 | 82.55,73.91 78.74,73.91 | 78.74,73.91 66.04,73.91 | 66.04,73.91 62.23,73.91 | 62.23,73.91 48.26,73.91 | 48.26,73.91 45.72,73.91 | 45.72,73.91 33.02,73.91 | 33.02,73.91 29.21,73.91 | 29.21,73.91 15.24,73.91 | 15.24,73.91 13.34,73.91 J1.GND2 | J1.GND1 15.88,74.55 15.24,73.91 | J2.GND2 29.84,74.55 29.21,73.91 | J2.GND1 32.38,74.55 33.02,73.91 | J3.GND2 46.35,74.55 45.72,73.91 | J3.GND1 48.9,74.55 48.26,73.91 | J4.GND2 62.87,74.55 62.23,73.91 | J4.GND1 65.41,74.55 66.04,73.91 | J5.GND2 79.38,74.55 78.74,73.91 | J5.GND1 81.92,74.55 82.55,73.91 | I2C-J4.GND2 98.74,76.45 98.74,73.91 | I2C-J4.GND1 100.97,73.91
  Top 2.54: U$6.GND2 7.62,37.04 Q7.3
  Bottom 0.457: v59.74,52.93 57.96,54.71 v56.9,54.71 | v55.47,50.09 57.25,48.31 58.32,48.31 58.67,47.95 U$1.VSS 59.03,47.95 59.38,48.31 60.45,48.31 60.81,48.67 v66.14,48.67 | CON1.GND 62.94,23.42 72.54,23.42 77.52,28.4 86.06,28.4 87.48,29.82 U$3.SGND 87.48,30.18 85.7,31.95 v62.23,31.95 58.32,31.95 RESET1.4 | v85.7,34.8 84.63,34.8 83.57,35.86 CFG.1 | C10.2 26.67,41.2 29.16,41.2 C12.1 29.52,41.2 v30.58,41.2 | v34.14,47.95 34.14,49.38 C7.1 | 31.29,31.6 IC1.1 | C5.2 39.47,28.4 39.47,30.53 C1.2 39.47,30.89 38.05,32.31 31.65,32.31 31.29,31.95 IC1.1 | IC1.1 30.94,31.95 29.52,33.38 13.51,33.38 13.16,33.73 9.25,33.73 7.82,32.31 U$6.GND1
  Bottom 1.27: Q2.3 31.75,69.39 31.75,73.91 32.38,73.91 J2.GND1 | Q4.3 48.26,69.39 48.26,73.91 48.9,73.91 J3.GND1 | Q5.3 64.77,69.39 64.77,73.91 65.41,73.91 J4.GND1 | Q6.3 81.28,69.39 81.28,73.91 81.92,73.91 J5.GND1 | Q1.3 15.24,69.39 15.24,73.91 15.88,73.91 J1.GND1
GND1
  Bottom 0.457: LED9.C 95.3,47.95 95.3,52.22 U$3.RNU
GND2
  Bottom 0.457: LED11.C 92.81,47.95 92.81,52.22 U$3.NET
GND3
  Bottom 0.457: LED12.C 90.32,47.95 90.32,52.22 U$3.ALM
HWB  (via drill 0.3)
  Top 0.356: v57.96,39.06 58.67,38.35 58.67,36.58 U$4.33 | v64.72,39.42 65.79,38.35 R3.2
  Bottom 0.356: v57.96,39.06 58.32,39.42 v64.72,39.42
ISP+5V  (via drill 0.3)
  Top 0.356: v65.08,22.71 70.05,27.69 v70.05,37.64
  Bottom 0.356: v65.08,22.71 62.94,20.57 CON1.5V | v70.05,37.64 35.2,37.64 29.52,43.33 19.91,43.33 18.85,42.27 D2.A
MISO  (via drill 0.3)
  Top 0.356: v60.81,20.93 70.05,20.93 70.05,26.62 71.12,27.69 v71.12,48.67 | v50.85,52.58 49.43,52.58 48.36,51.51 48.36,50.44 50.49,48.31 U$4.11
  Bottom 0.356: v60.81,20.93 61.16,20.93 61.52,20.57 CON1.MISO | v71.12,48.67 69.34,50.44 59.03,50.44 U$1.SO 58.67,50.44 57.96,50.44 55.83,52.58 v50.85,52.58
MOSI  (via drill 0.3)
  Top 0.356: v63.65,22.71 69.34,28.4 v69.34,38.35 | v49.07,51.16 51.21,49.02 51.21,48.31 U$4.10
  Bottom 0.356: v63.65,22.71 62.94,22 CON1.MOSI | v69.34,38.35 43.03,38.35 42.67,38.71 42.67,51.16 45.52,51.16 D5.C 45.87,51.16 v49.07,51.16
N$1
  Bottom 0.406: Q4.2 45.72,66.29 41.91,66.29 41.91,58.67 LED6.C
  Bottom 1.27: Q4.2 45.72,73.91 43.81,73.91 J3.PWM
N$2
  Bottom 0.406: J2.I/O 28.57,80.9 37.47,80.9 R32.2
N$3
  Top 0.356: LED1.A 63.65,28.04 66.14,30.53 66.14,31.24 66.5,31.6 68.63,31.6 68.63,29.82 67.56,28.75 RL5.2
N$4
  Bottom 0.406: LED5.A 33.02,58.67 R4.1
N$5
  Bottom 0.406: LED7.C 58.42,58.67 58.42,66.29 62.23,66.29 Q5.2
  Bottom 1.27: Q5.2 62.23,73.91 60.33,73.91 J4.PWM
N$6
  Top 0.356: RL2.2 16.71,15.6 12.8,19.51 Q7.1
N$7
  Bottom 0.406: J3.I/O 45.09,80.9 53.98,80.9 R33.2
N$8
  Top 0.356: RL1.2 LED13.A
N$9
  Top 0.457: 92.81,16.66 91.75,16.66 R21.2 | 92.81,16.66 95.3,16.66 RL8.2 | 92.81,16.66 92.81,9.2 X5.2
N$10  (via drill 0.3)
  Top 0.356: R17.1 64.72,48.67 64.72,50.8 R16.1 64.72,51.16 64.72,51.51 v65.43,52.22
  Bottom 0.356: v65.43,52.22 59.38,52.22 59.03,51.87 U$1.CE
N$11
  Bottom 0.356: R11.2 92.81,33.38 92.81,30.18 U$3.RX1
N$12
  Top 0.356: RL4.2 25.25,31.95 28.45,31.95 LED4.A
N$13
  Top 0.356: R2.2 37.69,17.73 37.34,17.37 37.34,5.64 37.69,5.28 42.32,5.28 42.32,14.17 44.81,16.66 IC2.1
N$14
  Top 0.356: LED14.A 19.56,49.73 23.11,49.73 RL7.2
N$15
  Top 0.356: R2.1 40.89,18.09 44.81,22 IC2.8
N$16
  Top 0.356: U$4.6 54.41,48.31 54.41,51.51 53.7,52.22 C3.2
N$17
  Bottom 0.406: LED2.A 16.51,58.67 R25.1
N$18
  Bottom 0.406: J1.I/O 12.06,80.9 20.95,80.9 R.2
N$19
  Bottom 0.406: Q6.2 78.74,66.29 74.93,66.29 74.93,58.67 LED8.C
  Bottom 1.27: Q6.2 78.74,73.91 76.83,73.91 J5.PWM
N$20
  Top 0.356: R27.1 25.25,26.98 28.45,26.98 LED3.A
N$21
  Top 0.457: 71.12,16.66 70.05,16.66 R10.2 | 71.12,16.66 73.97,16.66 RL6.2 | X2.2 71.12,16.66
N$22
  Bottom 0.406: LED6.A 49.53,58.67 R5.1
N$23
  Bottom 0.356: R18.2 65.79,44.75 67.56,46.53 72.19,46.53 72.54,46.89 72.54,47.95 61.16,47.95 60.45,47.24 53.34,47.24 51.56,49.02 50.85,49.02 U$1.SCK
N$24
  Bottom 0.356: R8.2 90.32,33.38 90.32,30.18 U$3.TX1
N$25
  Bottom 0.356: R12.1 95.3,40.84 95.3,44.04 LED9.A
N$26
  Bottom 0.356: R14.1 92.81,40.84 92.81,44.04 LED11.A
N$27
  Bottom 0.356: R39.1 90.32,40.84 90.32,44.04 LED12.A
N$28
  Bottom 0.406: Q2.2 29.21,66.29 25.4,66.29 25.4,58.67 LED5.C
  Bottom 1.27: Q2.2 29.21,73.91 27.3,73.91 J2.PWM
N$29
  Bottom 0.406: J4.I/O 61.59,80.9 70.48,80.9 R34.2
N$30
  Bottom 0.406: LED7.A 66.04,58.67 R6.1
N$32
  Bottom 0.406: J5.I/O 78.11,80.9 87,80.9 R35.2
N$33
  Bottom 0.406: LED8.A 82.55,58.67 R7.1
N$34
  Bottom 0.406: Q1.2 12.7,66.29 8.89,66.29 8.89,58.67 LED2.C
  Bottom 1.27: Q1.2 12.7,73.91 10.79,73.91 J1.PWM
N$35
  Bottom 0.356: CFG.4 78.94,43.33 78.94,51.51 78.23,51.51 77.52,52.22 U$3.CFG
N$36
  Top 2.54: Q7.2 22.86,7.87 J7.2
N$40  (via drill 0.3)
  Top 0.356: v39.47,22 38.05,22 R9.1 | v46.94,23.42 47.65,22.71 47.65,22 IC2.6
  Bottom 0.356: v39.47,22 40.89,23.42 v46.94,23.42
N$42
  Top 0.356: C8.2 35.92,39.78 39.12,39.78 X3.P$2 39.47,39.78 43.03,39.78 43.03,40.49 R13.2 43.38,40.84 43.38,42.27 48.72,42.27 U$4.17
N$75
  Top 0.356: LED10.A RL3.1
RD+
  Top 0.356: 37.69,55.78 37.69,51.87 35.92,50.09 R24.1 | 37.69,55.78 37.69,58.27 54.41,58.27 57.61,55.07 57.61,51.16 56.19,49.73 56.19,48.31 U$4.4 | 37.69,55.78 28.8,55.78 26.31,53.29 26.31,51.16 25.25,50.09 RL7.1
RD-  (via drill 0.3)
  Top 0.356: 35.56,54 35.56,53.29 R31.1 | 35.56,54 35.56,55.07 29.16,55.07 27.03,52.93 27.03,49.02 25.25,47.24 RL1.1 | v58.32,52.58 58.32,50.8 56.9,49.38 56.9,48.31 U$4.3 | 35.56,54 v36.98,54
  Bottom 0.356: v58.32,52.58 56.9,54 v36.98,54
RESET  (via drill 0.3)
  Top 0.356: v45.52,45.47 48.72,45.47 U$4.13 | v43.38,39.06 45.52,36.93 v45.52,25.55 | v52.27,25.2 52.27,28.4 R15.1 | v56.9,25.2 56.9,28.04 C9.1
  Bottom 0.356: 47.65,25.55 47.65,25.91 52.27,25.91 | 47.65,25.55 47.65,24.84 49.07,23.42 61.52,23.42 CON1.RESET | 56.9,25.91 52.27,25.91 | 56.9,25.91 57.96,26.98 RESET1.2 | v45.52,45.47 45.16,45.82 43.74,45.82 43.38,45.47 v43.38,39.06 | 47.65,25.55 v45.52,25.55 | 52.27,25.91 v52.27,25.2 | 56.9,25.91 v56.9,25.2
RX  (via drill 0.3)
  Top 0.356: v47.65,32.66 48.36,33.38 48.36,36.22 50.14,38 50.14,39.42 49.78,39.78 49.07,39.78 U$4.20
  Bottom 0.356: v47.65,32.66 41.6,32.66 41.6,33.73 42.67,34.8 60.1,34.8 60.81,34.09 86.06,34.09 86.77,34.8 89.61,34.8 89.97,35.15 R8.1
SCK  (via drill 0.3)
  Top 0.356: v60.1,21.64 60.1,20.57 60.45,20.22 70.76,20.22 70.76,26.26 71.83,27.33 v71.83,41.2 | v52.27,44.75 52.27,47.95 U$4.9
  Bottom 0.356: v60.1,21.64 61.52,21.64 CON1.SCK | v71.83,41.2 69.7,43.33 65.08,43.33 64.72,43.69 | 64.72,43.69 64.01,44.4 R18.1 | v52.27,44.75 53.34,43.69 64.72,43.69
SCL  (via drill 0.3)
  Top 0.356: v46.23,36.22 46.23,41.2 48.72,41.2 U$4.18 | v75.74,36.22 91.39,51.87 v91.39,55.07
  Bottom 0.356: v75.74,36.22 v46.23,36.22 | v91.39,55.07 93.88,57.56 93.98,57.56
  Bottom 0.406: I2C-J4.SCL 95.89,68.52 96.52,68.52 R28.2 93.98,65.97 93.98,57.56 93.98,57.4
SDA  (via drill 0.3)
  Top 0.356: v48.36,25.2 46.94,26.62 46.94,40.49 48.72,40.49 U$4.19 | v81.08,31.24 102.06,52.22 v102.06,57.56
  Bottom 0.356: v48.36,25.2 49.07,24.49 59.74,24.49 66.5,31.24 v81.08,31.24 | v102.06,57.56 101.92,57.56
  Bottom 0.406: I2C-J4.SDA 97.16,71.06 99.06,71.06 R29.2 101.92,65.97 101.92,57.56 101.92,57.4
TX  (via drill 0.3)
  Top 0.356: v47.65,34.09 47.65,39.06 48.72,39.06 U$4.21 | v44.81,36.22 v44.81,34.09
  Bottom 0.356: v44.81,34.09 v47.65,34.09 | v44.81,36.22 45.52,36.93 76.81,36.93 78.23,38.35 88.54,38.35 90.32,36.58 91.39,36.58 92.46,35.51 R11.1
VUSB  (via drill 0.3)
  Top 0.356: v51.56,53.29 51.56,51.87 53.7,49.73 53.7,48.31 U$4.7 | v6.04,52.22 6.4,52.58 7.82,52.58 X4.1 8.18,52.58 v10.31,52.58
  Bottom 0.356: v51.56,53.29 35.2,53.29 34.49,52.58 C7.2 34.14,52.22 33.78,51.87 11.02,51.87 v10.31,52.58 | v6.04,52.22 18.49,39.78 D4.A
XTAL1
  Top 0.356: U$4.16 48.72,42.98 43.38,42.98 43.38,43.33 R13.1 43.03,43.69 39.47,43.69 39.47,44.75 X3.P$1 39.12,44.75 35.92,44.75 C2.2

## Text on the board
tNames: BioReactor | Control Board v2 | 1 | 1 | w5100
bNames: USB | TX/RX | LINKLED
tValues: PID | Weight | Tplate | Tliquid | 5V | - | + | GND | 5V | DAT | GND | 5V | DAT | GND
203bmp: C:/Users/G/Pictures/logo_epfl.bmp